# EAGLE board PLT-01-RevA (EAGLE 9.6.2)
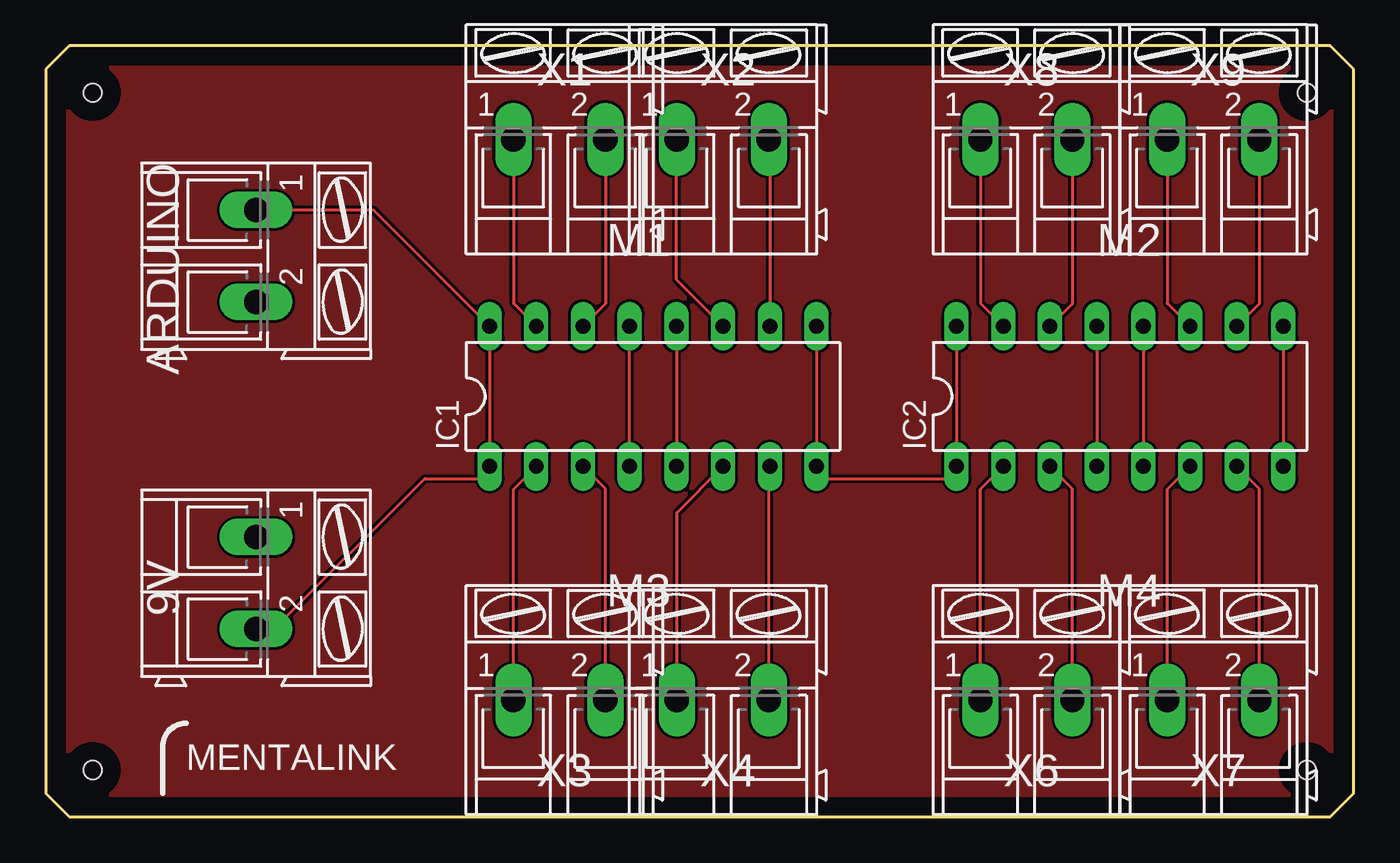
[diagram p0: board, top side]
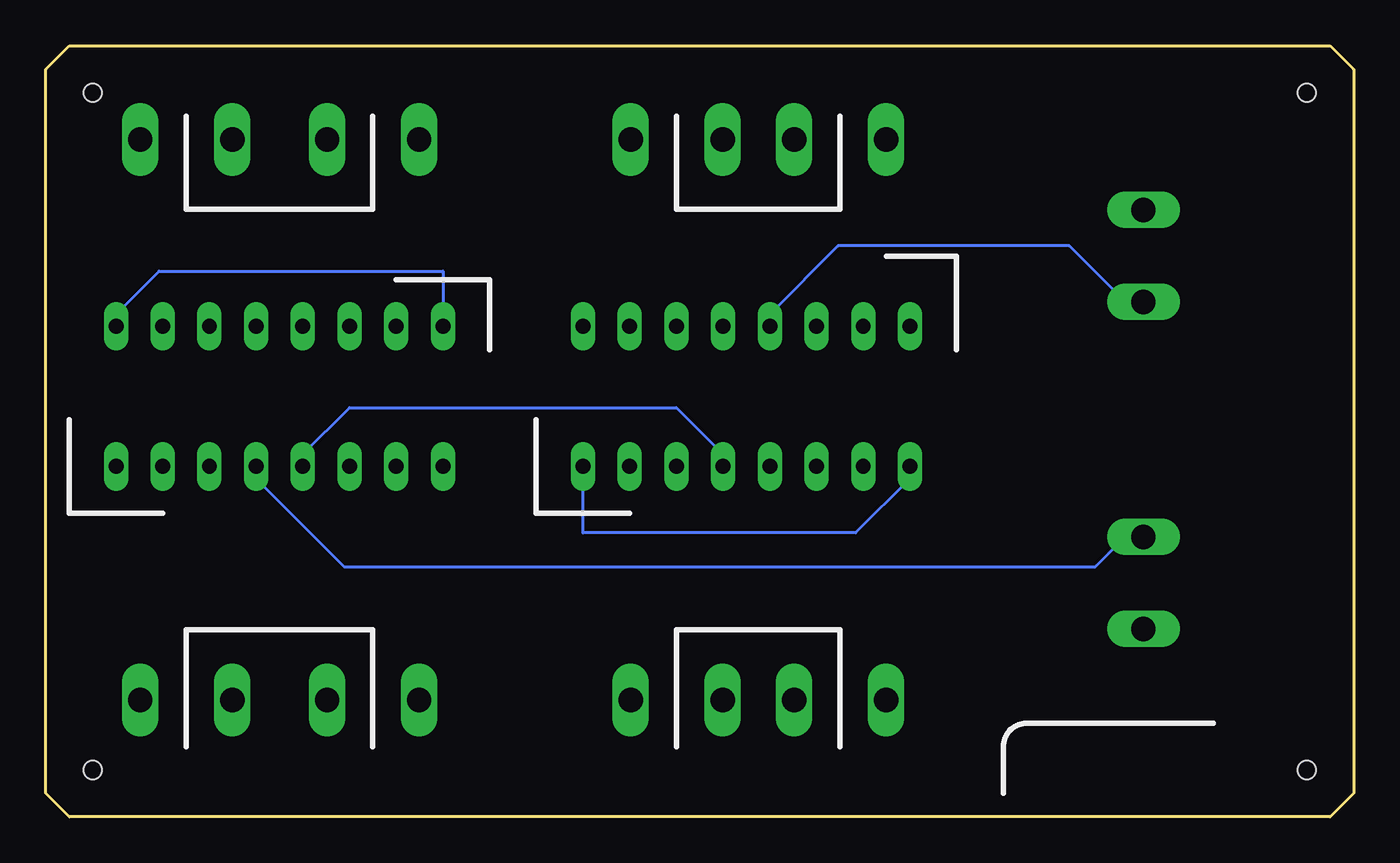
[diagram p1: board, bottom side, seen from below]

Size 71.12 x 41.91 mm. Coordinates in mm from the lower left corner, seen from the top.
Outline: 1.27,41.91 0,40.64 0,1.27 1.27,0 69.85,0 71.12,1.27 71.12,40.64 69.85,41.91 1.27,41.91
Copper layers (1*16): Top 0.035mm / dielectric 1.5mm / Bottom 0.035mm
Design rules "default": minimum track width 6mil, minimum drill 0.35mm, track to track 6mil, track to pad 6mil, pad to pad 6mil, via to via 6mil, smd to smd 6mil, copper to edge 40mil, drill to drill 6mil, minimum pad ring 10mil, minimum via ring 8mil, stop-mask expansion 4mil, vias tented up to drill 0mil, thermal gap 10mil
Holes 1 mm at 2.54,39.37 2.54,2.54 68.58,2.54 68.58,39.37

## Footprints (pad centres in the part's own frame; a part is rotated, then mirrored left to right if it is on the bottom)
AK300/2 = drill 1.321 long: 1 -2.515,0; 2 2.489,0
DIL16 = drill 0.813 long: 1 -8.89,-3.81; 2 -6.35,-3.81; 3 -3.81,-3.81; 4 -1.27,-3.81; 5 1.27,-3.81; 6 3.81,-3.81; 7 6.35,-3.81; 8 8.89,-3.81; 9 8.89,3.81; 10 6.35,3.81; 11 3.81,3.81; 12 1.27,3.81; 13 -1.27,3.81; 14 -3.81,3.81; 15 -6.35,3.81; 16 -8.89,3.81

## Placement (x,y rotation side)
9V  [AK300/2]  11.43,12.7 270 top
ARDUINO  [AK300/2]  11.43,30.48 270 top
IC1  L293D  [DIL16]  33.02,22.86 0 top
IC2  L293D  [DIL16]  58.42,22.86 0 top
X1  [AK300/2]  27.94,36.83 0 top
X2  [AK300/2]  36.83,36.83 0 top
X3  [AK300/2]  27.94,6.35 0 top
X4  [AK300/2]  36.83,6.35 0 top
X6  [AK300/2]  53.34,6.35 0 top
X7  [AK300/2]  63.5,6.35 0 top
X8  [AK300/2]  53.34,36.83 0 top
X9  [AK300/2]  63.5,36.83 0 top

## Library data of the parts
9V ARDUINO X1-X4 X6-X9 = con-ptr500; OC_FARNELL: unknown; OC_NEWARK: unknown
IC1 IC2 = st-microelectronics; MPN: L293D; OC_FARNELL: 9589619; OC_NEWARK: 56P8249

## Nets
N$1: IC1.15 X1.1
N$2: IC1.14 X1.2
N$3: IC1.11 X2.1
N$4: IC1.10 X2.2
N$5: IC1.2 X3.1
N$6: IC1.3 X3.2
N$7: IC1.6 X4.1
N$8: IC1.7 X4.2
N$9: IC2.2 X6.1
N$10: IC2.3 X6.2
N$11: IC2.6 X7.1
N$12: IC2.7 X7.2
N$13: IC2.10 X9.2
N$14: IC2.11 X9.1
N$15: IC2.15 X8.1
N$16: IC2.14 X8.2
N$17: 9V.2 ARDUINO.1 IC1.1 IC1.8 IC1.9 IC1.16 IC2.1 IC2.8 IC2.9 IC2.16
N$18: ARDUINO.2 IC1.4 IC1.13
N$20: 9V.1 IC2.5 IC2.12
N$21: IC1.5 IC1.12 IC2.4 IC2.13

## Tracks (layer width: path | path; a pad name or v marks a point on that pad's centre or on a via)
GND
  pour Top: 1.27,41.91 0,40.64 0,1.27 1.27,0 69.85,0 71.12,1.27 71.12,40.64 69.85,41.91
N$1
  Top 0.152: X1.1 25.43,27.91 IC1.15
N$2
  Top 0.152: X1.2 30.43,27.89 IC1.14
N$3
  Top 0.152: IC1.11 34.29,29.21 34.29,36.83 X2.1
N$4
  Top 0.152: X2.2 39.37,36.78 IC1.10
N$5
  Top 0.152: X3.1 25.43,17.8 IC1.2
N$6
  Top 0.152: X3.2 30.43,17.83 IC1.3
N$7
  Top 0.152: X4.1 34.31,16.53 IC1.6
N$8
  Top 0.152: X4.2 39.32,19 IC1.7
N$9
  Top 0.152: X6.1 50.83,17.8 IC2.2
N$10
  Top 0.152: X6.2 55.83,17.83 IC2.3
N$11
  Top 0.152: X7.1 60.98,17.8 IC2.6
N$12
  Top 0.152: X7.2 65.99,17.83 IC2.7
N$13
  Top 0.152: X9.2 65.99,27.89 IC2.10
N$14
  Top 0.152: X9.1 60.98,27.91 IC2.11
N$15
  Top 0.152: X8.1 50.83,27.91 IC2.15
N$16
  Top 0.152: X8.2 55.83,27.89 IC2.14
N$17
  Top 0.152: ARDUINO.1 17.8,33 IC1.16 IC1.1 24.13,18.39 20.6,18.39 12.42,10.21 9V.2 | IC1.9 41.91,26.01 41.91,19.71 IC1.8 41.91,18.39 49.53,18.39 IC2.1 49.53,19.71 49.53,26.01 IC2.16 | IC2.9 67.31,26.01 67.31,19.71 IC2.8
  Bottom 0.152: IC2.9 67.31,27.33 64.97,29.67 49.53,29.67 49.53,27.33 IC2.16 | IC1.1 24.13,18.39 27.09,15.43 41.91,15.43 41.91,18.39 IC1.8
N$18
  Top 0.152: IC1.4 31.75,19.71 31.75,26.01 IC1.13
  Bottom 0.152: ARDUINO.2 12.42,27.99 15.47,31.04 28.04,31.04 31.75,27.33 IC1.13
N$20
  Top 0.152: IC2.12 IC2.5
  Bottom 0.152: 9V.1 12.42,15.22 14.06,13.58 54.88,13.58 59.69,18.39 IC2.5
N$21
  Top 0.152: IC2.13 IC2.4 | IC1.12 34.29,26.01 34.29,19.71 IC1.5
  Bottom 0.152: IC2.4 57.15,19.71 54.61,22.25 36.83,22.25 34.29,19.71 IC1.5

## Text on the board
tNames: M1 | M2 | M3 | M4 | MENTALINK